# Altium PCB Master.PcbDoc (part 2 of 2)
Units mil, origin at the board's own origin, x right, y up, seen from the top; angles counter-clockwise.
Board outline 11420.03 x 8220.01 mil, 2 copper layers (Top Layer, Bottom Layer); 224 components, 0 nets, 1169 pads, 54 vias.
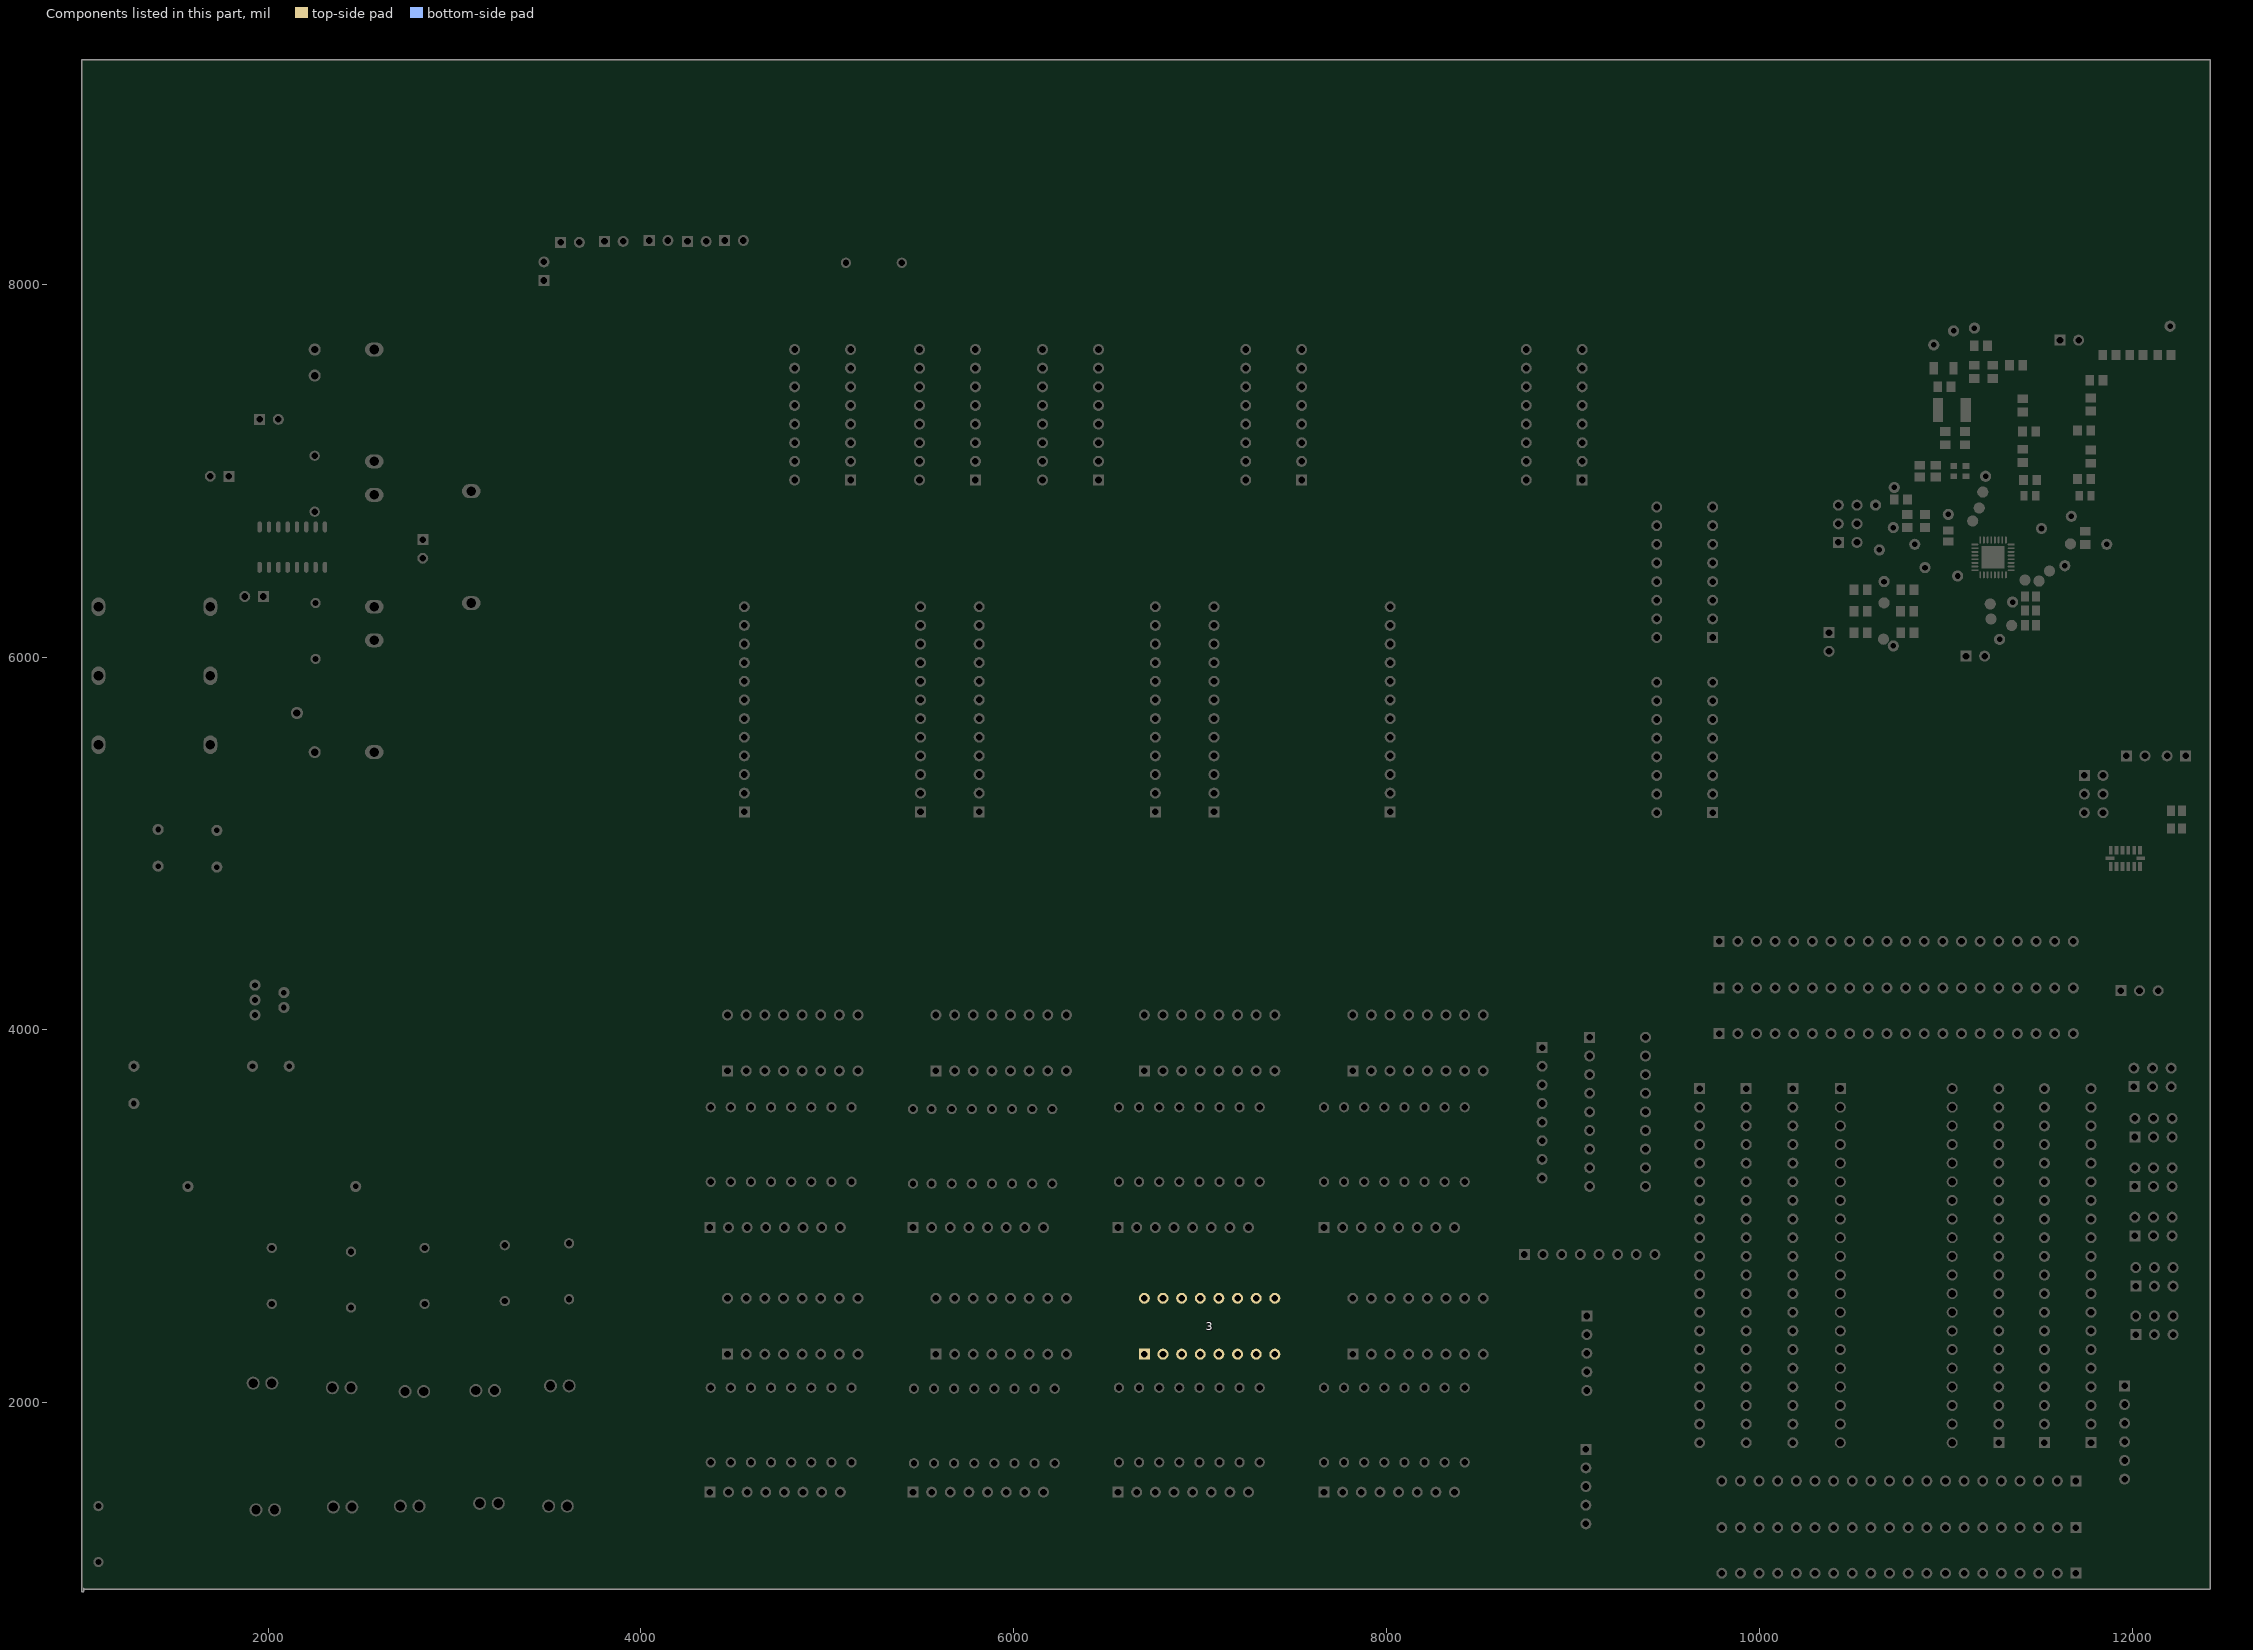
[diagram p2: the components of this part, seen from the top]

## Via types
v1: diameter 50, hole 28, Top Layer to Bottom Layer, 42 vias
v2: diameter 19.68, hole 7.87, Top Layer to Bottom Layer, 9 vias
v3: diameter 40, hole 27, Top Layer to Bottom Layer, 3 vias

## Nets (pads, with @x,y where several pads share a name; then routed paths per layer and width w, separated by ;. In a path a pad name is that pad's centre, name@x,y a point inside that pad or via, vN(x,y) a via of type N, cw(c..) or ccw(c..) an arc to the next point about the centre after c; other vN are vias at no path point) (continued)
copper on no net: | length 666454
  Top Layer w10: 1005,990 1005,9200 12415,9200 12415,1005 ; 1005,5340 2835,5340 2835,2980 ; 1005,5355 3235,5355 3235,7760 1005,7760 ; 1015,1005 12415,1005 ; 1090,5530 1090,5900 1090,6270 1090,6450 1240,6600 1635,6600 1690,6655 ; 1280,3605 1280,3610 ; 1280,3805 1280,3815 ; 1290,3600 1290,3605 ; 1690,5530 1690,5900 1690,6270 1715,6270 1810,6175 2000,6175 2105,6280 2105,6481.73 2105,6698.27 2105,7150 2145,7190 2145,7350 2110,7385 1865,7385 1790,7310 1790,6970 ; 1690,6970 1690,6655 ; 1875,6325 1955,6405 1955,6481.73 ; 1930,4155 1930,4160 ; 1950,7290 1950,6703.27 1955,6698.27 ; 1975,6325 2055,6405 2055,6481.73 ; 2005,6481.73 2005,6692.64 ; 2005,6600 1745,6600 1690,6655 ; 2050,7290 2055,7285 2055,6698.27 ; 2085,4115 2085,4120 ; 2155,5700 2155,6481.73 ; 2155,6698.27 2155,7090 2250,7185 2250,7510 ; 2205,6481.73 2205,6530 2235,6560 2800,6560 2830,6530 2830,6380 2920,6290 3090,6290 ; 2205,6698.27 2205,6640 2235,6610 2275,6610 2305,6640 2305,6698.27 2305,6805 2370,6870 2570,6870 2735,6870 2830,6775 2830,6630 3045,6630 3090,6675 3090,6890 ; 2250,5490 2570,5490 ; 2250,6703.27 2250,6780 2250,7080 2330,7080 2360,7050 2570,7050 ; 2250,7650 2570,7650 ; 2255,6481.73 2255,6290 2255,5990 2350,5990 2450,6090 2570,6090 ; 2305,6481.73 2305,6453.8 2305,6397.93 2305,6370 2405,6270 2570,6270 ; 2350,1440 2360,1440 ; 2425,2830 2445,2810 ; 2485,3580 2485,3585 ; 2710,1445 2725,1445 ; 2820,2810 2840,2830 2855,2845 ; 3480,8020 3678,8020 3855,8197 3855,8275 3907,8327 4048,8327 4100,8275 4100,7995 4790,7305 4839.53,7305 4869.53,7275 4869.53,7225.53 4838.53,7194.53 4800,7194.53 4780.47,7175 4780.47,6994.53 4825,6950 ; 3905,8230 3905,8133.11 4756.56,7281.56 4793.44,7281.56 4825,7250 4760.47,7185.47 4760.47,5775.47 4555,5570 ; 3955,995 9810,995 ; 3985,995 3985,4530 ; 3985,2990 3985,4530 ; 4145,8235 4239,8329 4350,8329 4398,8281 4398,7811 4804,7405 4850,7405 4870,7425 4870,7505 4825,7550 ; 4350,8230 4350,7825 4825,7350 ; 4370,1520 4370,1597 4374.88,1601.88 4374.88,1680 ; 4370,2940 4402.44,2972.44 4374.88,3000 4374.88,3185 ; 4374.88,2080 4374.88,2369.88 4565,2560 ; v1(4410,3980) 4565,3980 4665,4080 ; 4455,5170 4555,5170 ; 4465,2260 4465,2178.76 4482.76,2161 4482.76,2080 ; 4465,3780 4465,3690.76 4482.76,3673 4482.76,3585 ; 4470,1520 4470,1593 4482.76,1605.76 4482.76,1680 ; 4470,2940 4470,3056 4482.76,3068.76 4482.76,3185 ; 4495,5150 4555,5170 ; 4495,5190 4555,5170 ; 4550,8235 4550,7725 4825,7450 ; 4555,5160 4555,5180 ; 4555,5270 5031,5746 5031,7156 5125,7250 ; 4555,5470 4510,5425 4510,5245 4530,5225 5011,5225 5302,5516 5302,6663.27 5634,6995.27 5634,7189 5795,7350 ; 4555,5870 4510,5825 4510,5540 4530,5520 4620,5520 4803,5703 4803,6675 4997,6869 4997,7322 5125,7450 5170,7495 5520,7495 5540,7475 5540,7195 5495,7150 ; 4565,2260 4565,2105.63 4590.63,2080 ; 4565,3780 4565,3610.63 4590.63,3585 ; 4570,1520 4570,1659.37 4590.63,1680 ; 4570,2940 4570,3164.37 4590.63,3185 ; 4665,2260 4665,2113.5 4698.5,2080 ; 4665,3780 4665,3618.5 4698.5,3585 ; 4670,1520 4698.5,1548.5 4698.5,1680 ; 4670,2940 4698.5,2968.5 4698.5,3185 ; 4765,2260 4765,2121.38 4806.38,2080 ; 4765,3780 4765,3626.38 4806.38,3585 ; 4765,4080 4649,4196 4498,4196 4285,3983 4285,2754 4400,2639 4686,2639 4765,2560 4915,2410 5015,2410 5165,2260 5220,2315 ; 4770,1520 4806.38,1556.38 4806.38,1680 ; 4770,2940 4806.38,2976.38 4806.38,3185 ; 4825,7150 4957,7282 4957,7435 5027,7505 5143,7505 5233,7595 5587,7595 5771,7779 6251,7779 6287,7743 6287,7694 6243,7650 6155,7650 ; 4865,2260 4865,2129.25 4914.25,2080 ; 4865,2560 4675,2750 4420,2750 4315,2855 4315,3740 4470,3895 4680,3895 4865,4080 4952,3993 5152,3993 5285,3860 5285,2960 5495,2750 5793.1,2750 5983.1,2560 6180.1,2363 6354,2363 6462,2255 6462,2080 6515,2027 6592,2027 6620,2055 6620,2291 6650,2321 6847,2321 7056,2530 7056,2560 7101.19,2560 6928.19,2733 6538,2733 6505,2766 6505,3259 6619,3373 6619,3798 6751,3930 6951.19,3930 7101.19,4080 ; 4865,3780 4865,3634.25 4914.25,3585 ; 4870,1520 4914.25,1564.25 4914.25,1680 ; 4870,2940 4914.25,2984.25 4914.25,3185 ; 4965,2260 4965,2137.13 5022.13,2080 ; 4965,2560 v1(4965,2766) ; 4965,3780 4965,3642.13 5022.13,3585 ; 4965,4080 5049.53,4164.53 5998.57,4164.53 6083.1,4080 ; 4970,1520 5022.13,1572.13 5022.13,1680 ; 4970,2940 5022.13,2992.13 5022.13,3185 ; 5065,2260 5065,2145 5130,2080 ; 5065,3780 5065,3650 5130,3585 ; v1(5065,5345) 5282,5562 5282,6837 5495,7050 ; 5070,1520 5130,1580 5130,1680 ; 5070,2940 5130,3000 5130,3185 ; 5085,5160 5085,5180 ; v1(5085,6766) 5080,6771 5080,7105 5125,7150 ; v1(5125,5620) 5125,6950 ; 5125,7350 5395,7350 5495,7250 ; 5145,5150 5085,5170 ; 5145,5190 5085,5170 ; 5165,3780 5220,3725 5220,2315 ; 5165,4080 5497,4080 5551.53,4134.53 5728.57,4134.53 5783.1,4080 ; 5185,5170 5085,5170 ; v1(5235,6070) 5235,6914 5421,7100 5550,7100 5590,7140 5590,7345 5795,7550 ; 5300,5170 5400,5170 ; 5340,5150 5400,5170 ; 5340,5190 5400,5170 ; v1(5342,5870) 5342,5524 5065,5247 5065,5112 5132,5045 5132,4915 5174,4873 9663.47,4873 9705.47,4915 9705.47,5970.94 9794.53,6060 9794.53,6425.47 9770,6450 9730,6450 9705,6475 9705,6560 9750,6605 ; 5400,5160 5400,5180 ; v1(5455,5820) 5532,5820 5706,5994 5706,7155 5746,7195 5820,7195 5859.53,7234.53 5859.53,7405 5844.53,7420 5795,7450 ; 5460,1520 5460,1595 5464.88,1599.88 5464.88,1675 ; 5460,2940 5460,3175 ; 5460,3575 5460,3856.9 5683.1,4080 ; 5464.88,2075 5464.88,2341.79 5683.1,2560 ; 5495,7650 v1(5715,7870) ; 5500,5160 5500,5180 ; 5500,5270 5351,5270 5184,5103 5184,5005 5273,4916 9630,4916 9685.47,4971.47 9685.47,6340.47 9750,6405 ; 5500,5470 5395,5575 5395,6684 v1(5568,6857) ; 5500,5570 5572,5570 5677,5465 5677,5158 5714,5121 6320,5121 6436,5005 9489,5005 9604,5120 9604,6683.53 9670,6749.53 9770,6749.53 9794.53,6725 9794.53,6549.53 9750,6505 ; 5500,5770 5670,5770 5728,5828 5728,7084 5744,7100 5855,7100 5967,7212 v1(5967,7689) ; 5500,6070 5672,6242 5672,7193 5784,7305 5829.53,7305 5839.53,7315 5839.53,7394 5838.53,7395 5770,7395 5750,7415 5750,7474 5776,7500 5810,7500 5871.53,7561.53 5871.53,7675 5931.06,7734.53 v1(6236.47,7734.53) ; 5500,6170 5415,6085 5415,5586 5486,5515 5595,5515 5635,5475 5635,5166 5844,4957 9502,4957 9660,5115 9660,6615 9750,6705 ; 5559.88,3175 5559.88,3057.12 5560,3057 5560,2940 ; 5559.88,3575 5583.1,3598.21 5583.1,3780 ; 5560,1520 5560,1591 5572.76,1603.76 5572.76,1675 ; 5560,5150 5500,5170 ; 5560,5190 5500,5170 ; 5572.76,2075 5572.76,2162 5583.1,2172.34 5583.1,2260 ; 5600,5170 5500,5170 ; 5660,1520 5660,1654.37 5680.63,1675 ; 5660,2940 5660,3053 5667.76,3060.76 5667.76,3175 ; 5667.76,3575 5667.76,3669 5683.1,3684.34 5683.1,3780 ; 5680.63,2075 5680.63,2166 5683.1,2168.47 5683.1,2260 ; 5715,5170 5815,5170 ; 5755,5150 5815,5170 ; 5755,5190 5815,5170 ; 5760,1520 5788.5,1548.5 5788.5,1675 ; 5760,2940 5760,3049 5775.63,3064.63 5775.63,3175 ; 5775.63,3575 5775.63,3673 5783.1,3680.47 5783.1,3780 ; 5783.1,2260 5783.1,2169.41 5788.5,2164 5788.5,2075 ; 5795,6950 5750.47,6905.47 5750.47,5859.53 5790,5820 5830,5820 5900,5750 v1(5900,5470) ; 5795,7050 5870,6975 5870,6901 5770.47,6801.47 5770.47,5935 5780.47,5925 6057,5925 6357,5625 6782,5625 6804.53,5647.53 6804.53,5725.47 6760,5770 ; 5815,5160 5815,5180 ; 5815,5370 5876.74,5370 6021.74,5515 6785,5515 6824.53,5554.53 6824.53,6811.47 6758,6878 6758,6947 6455,7250 ; 5815,5470 5879.53,5534.53 5879.53,5675.47 5840,5715 5790,5715 5750,5675 5750,5255 5790,5215 6656,5215 6710,5161 6710,5134 6720,5124 6876,5124 6961,5209 6961,5275 7011,5325 7110,5325 7120,5335 7120,5415 7117,5418 7057.47,5418 7010.47,5465 7010.47,5772.47 7063,5825 7110,5825 7332,6047 7332,7181 7425,7274 7425,7305 7470,7350 7545,7350 ; 5815,5670 5770,5625 5770,5340 5790,5320 6638,5320 6735,5223 6830,5223 6872,5265 6872,7401 6778,7495 6600,7495 6455,7350 ; 5815,5970 6260,6415 6260,7255 6455,7450 ; 5815,6070 5859.53,6114.53 5859.53,6244.53 6230,6615 6230,7417 6318,7505 6539,7505 v1(6617,7583) ; 5815,6270 6200,6655 6200,7480 6270,7550 6455,7550 ; 5860,1520 5896.38,1556.38 5896.38,1675 ; 5860,2940 5883.5,2963.5 5883.5,3175 ; 5883.1,2260 5883.1,2173.28 5896.38,2160 5896.38,2075 ; 5883.1,3780 5883.1,3677.41 5883.5,3677 5883.5,3575 ; 5960,1520 6004.25,1564.25 6004.25,1675 ; 5960,2940 5991.38,2971.38 5991.38,3175 ; 5983.1,2260 5983.1,2096.16 6004.25,2075 ; 5983.1,3780 5983.1,3681.28 5991.38,3673 5991.38,3575 ; 6060,1520 6112.13,1572.13 6112.13,1675 ; 6060,2940 6099.25,2979.25 6099.25,3175 ; 6083.1,2260 6083.1,2104.03 6112.13,2075 ; 6083.1,2560 6338,2814.9 6338,3825.1 6083.1,4080 ; 6083.1,3780 6083.1,3685.16 6099.25,3669 6099.25,3575 ; 6155,7050 6110,7095 6110,7575 6130,7595 6568.84,7595 6607.84,7634 6726,7634 6990.47,7369.53 6990.47,5454.53 7075,5370 ; 6160,1520 6220,1580 6220,1675 ; 6160,2940 6207.13,2987.13 6207.13,3175 ; 6183.1,2260 6183.1,2111.9 6220,2075 ; 6183.1,3780 6183.1,3599.03 6207.13,3575 ; 6283.1,2260 6228.1,2315 6128.1,2315 5883.1,2560 5809.1,2634 5539,2634 5220,2315 ; 6283.1,2560 6338.1,2615 6846.19,2615 6901.19,2560 ; 6283.1,4080 6337.62,4134.53 6846.66,4134.53 6901.19,4080 ; v1(6328,7100) 6475,7100 6685,6890 6685,6145 6760,6070 ; v1(6339,5709) 6288,5760 6288,7241 6347,7300 6580,7300 v1(6735,7455) ; 6345,5160 6345,5180 ; 6405,5150 6345,5170 ; 6405,5190 6345,5170 ; 6445,5170 6345,5170 ; 6455,6950 6455,5975 6760,5670 ; 6455,7050 6528,6977 6528,6202 6760,5970 ; 6455,7150 6760,6845 6760,6270 ; 6560,1520 6560,1597 6564.88,1601.88 6564.88,1680 ; 6560,2940 6560,3060 6564.88,3064.88 6564.88,3185 ; 6560,5170 6660,5170 ; 6564.88,2080 6564.88,2323.69 6801.19,2560 ; 6564.88,3585 6539.66,3610.22 6539.66,3880 6570.6,3910.94 6632.13,3910.94 6801.19,4080 ; v1(6590,3855) 6633,3855 6772,3994 6915.19,3994 7001.19,4080 ; 6600,5150 6660,5170 ; 6600,5190 6660,5170 ; 6660,1520 6660,1593 6672.76,1605.76 6672.76,1680 ; 6660,2940 6660,3056 6672.76,3068.76 6672.76,3185 ; 6660,5160 6660,5180 ; 6672.76,2080 6701.19,2108.43 6701.19,2260 ; 6672.76,3585 6701.19,3613.43 6701.19,3780 ; 6760,1520 6760,1659.37 6780.63,1680 ; 6760,2940 6760,3164.37 6780.63,3185 ; 6760,5160 6760,5180 ; 6760,5270 6844.53,5354.53 6844.53,6912.47 v1(6832,6925) ; v1(6780,8115) 7245,7650 ; 6780.63,2080 6801.19,2100.56 6801.19,2260 ; 6780.63,3585 6801.19,3605.56 6801.19,3780 ; 6820,5150 6760,5170 ; 6820,5190 6760,5170 ; 6860,1520 6888.5,1548.5 6888.5,1680 ; 6860,2940 6888.5,2968.5 6888.5,3185 ; 6860,5170 6760,5170 ; 6888.5,2080 6888.5,2163 6901.19,2175.69 6901.19,2260 ; 6888.5,3585 6888.5,3676 6901.19,3688.69 6901.19,3780 ; 6960,1520 6996.38,1556.38 6996.38,1680 ; 6960,2940 6996.38,2976.38 6996.38,3185 ; 6975,5170 7075,5170 ; 6996.38,2080 6996.38,2167 7001.19,2171.81 7001.19,2260 ; 6996.38,3585 6996.38,3680 7001.19,3684.81 7001.19,3780 ; 7015,5150 7075,5170 ; 7015,5190 7075,5170 ; 7060,1520 7104.25,1564.25 7104.25,1680 ; 7060,2940 7104.25,2984.25 7104.25,3185 ; 7075,5160 7075,5180 ; 7075,5270 7120.54,5270 7135.54,5255 7434,5255 7590,5099 8172,5099 8675,5602 v1(8675,6135) ; 7075,5470 7030.47,5514.53 7030.47,5595 7050.47,5615 7130,5615 7448,5297 7803,5297 7975,5125 8129,5125 8489,5485 8489,6955 8534,7000 9000,7000 9050,6950 ; 7075,5570 7370,5275 7757,5275 v1(7867,5165) ; 7075,5770 7134.97,5770 7440,6075.03 7440,7153.59 7446.41,7160 7446.41,7286.41 7460,7300 7880,7300 8075,7105 8995,7105 9050,7050 ; v1(7084.19,2477) 7184.19,2477 7401.19,2260 ; 7101.19,2260 7101.19,2171.06 7104.25,2168 7104.25,2080 ; 7101.19,3780 7101.19,3683.06 7104.25,3680 7104.25,3585 ; 7160,1520 7212.13,1572.13 7212.13,1680 ; 7160,2940 7212.13,2992.13 7212.13,3185 ; 7201.19,2260 7201.19,2174.94 7212.13,2164 7212.13,2080 ; 7201.19,2560 7287.19,2646 7738,2646 ; 7201.19,3780 7201.19,3687.94 7212.13,3677 7212.13,3585 ; 7245,7150 7364.66,7269.66 7364.66,7644.66 7435,7715 8685,7715 8750,7650 ; 7260,1520 7320,1580 7320,1680 ; 7260,2940 7320,3000 7320,3185 ; 7301.19,2260 7301.19,2178.81 7320,2160 7320,2080 ; 7301.19,3780 7301.19,3691.81 7320,3673 7320,3585 ; 7401.19,2560 7456.19,2615 7964.29,2615 8019.29,2560 ; 7401.19,4080 7532.19,4211 7888.29,4211 8019.29,4080 ; v1(7480,5355) 7460,5375 7460,7140 7501,7181 7501,7206 7545,7250 ; v1(7500,7100) 7500,5690 8020,5170 ; 7545,6950 7545,5945 8020,5470 ; 7545,7050 7613,6982 7613,6177 8020,5770 ; 7545,7150 7884,6811 7884,6206 8020,6070 ; 7605,5160 7605,5180 ; 7664.88,1680 7664.88,1599.12 7665,1599 7665,1520 ; 7664.88,2080 7664.88,2305.6 7919.29,2560 ; 7664.88,3185 7664.88,3062.12 7665,3062 7665,2940 ; 7664.88,3585 7664.88,3825.6 7919.29,4080 ; 7665,5150 7605,5170 ; 7665,5190 7605,5170 ; 7705,5170 7605,5170 ; 7765,1520 7765,1596 7772.76,1603.76 7772.76,1680 ; 7765,2940 7765,3058 7772.76,3065.76 7772.76,3185 ; 7772.76,2080 7772.76,2213.47 7819.29,2260 ; 7772.76,3585 7819.29,3631.53 7819.29,3780 ; 7865,1520 7865,1592 7880.63,1607.63 7880.63,1680 ; 7865,2940 7865,3054 7880.63,3069.63 7880.63,3185 ; 7880.63,2080 7919.29,2118.66 7919.29,2260 ; 7880.63,3585 7919.29,3623.66 7919.29,3780 ; v1(7917,5336) 8006,5425 8055,5425 8065,5435 8065,7005 8110,7050 8750,7050 ; 7965,1520 7988.5,1543.5 7988.5,1680 ; 7965,2940 7988.5,2963.5 7988.5,3185 ; 7988.5,2080 8019.29,2110.78 8019.29,2260 ; 7988.5,3585 8019.29,3615.78 8019.29,3780 ; 8065,1520 8096.38,1551.38 8096.38,1680 ; 8065,2940 8096.38,2971.38 8096.38,3185 ; 8096.38,2080 8119.29,2102.91 8119.29,2260 ; 8096.38,3585 8119.29,3607.91 8119.29,3780 ; 8119.29,2560 8204.29,2475 8304.29,2475 8519.29,2260 ; 8165,1520 8204.25,1559.25 8204.25,1680 ; 8165,2940 8204.25,2979.25 8204.25,3185 ; 8204.25,2080 8204.25,2162 8219.29,2177.03 8219.29,2260 ; 8204.25,3585 8204.25,3674 8219.29,3689.03 8219.29,3780 ; 8219.29,2560 8273.86,2505.42 8316.29,2505.42 8496.48,2325.24 8574,2325.24 8574,1421 8700,1295 9100,1295 9125,1320 9125,1395 9070,1450 9154.53,1534.53 9154.53,2285.47 9075,2365 8685,2755 8685,4197 8652,4230 8369.29,4230 8219.29,4080 ; 8265,1520 8312.13,1567.13 8312.13,1680 ; 8265,2940 8312.13,2987.13 8312.13,3185 ; 8312.13,2080 8312.13,2166 8319.29,2173.16 8319.29,2260 ; 8312.13,3585 8312.13,3678 8319.29,3685.16 8319.29,3780 ; 8319.29,4080 8374.29,4135 8548,4135 8604,4079 8604,2520 8589.31,2505.31 8373.97,2505.31 ; 8365,1520 8420,1575 8420,1680 ; 8365,2940 8420,2995 8420,3185 ; 8419.29,2260 8419.29,2169.71 8420,2169 8420,2080 ; 8419.29,2560 8574,2714.71 8574,3925.29 8419.29,4080 ; 8419.29,3780 8419.29,3682.71 8420,3682 8420,3585 ; 8740,2795 8740,3030.47 8889.53,3180 8889.53,3659.53 9090,3860 ; v1(8750,6105) 8750,6950 ; 8750,7150 8685,7215 8685,7575 8705,7595 8775,7595 8795,7615 8795,7825 v1(8750,7870) ; 8750,7250 8795,7295 9075,7295 9115,7255 9115,6939 ; 8750,7550 8895,7405 9062,7405 9553,6914 9553,6808 9450,6705 9476.28,6678.72 9490.8,6678.72 9514.53,6655 9514.53,5829.53 9450,5765 ; v1(8776,5865) 8776,5657 9313,5120 9470,5120 9517,5167 v1(9517,5265) ; 8835,3205 8780,3260 8780,3955 8850,4025 9150,4025 9218,3957 9218,3832 9390,3660 ; 8840,2795 8840,3055.48 8919.53,3135.01 8919.53,3489.53 9090,3660 ; 8940,2795 8940,3103.47 8949.53,3113 8949.53,3319.53 9090,3460 ; v1(8990,6105) 8990,5625 9450,5165 ; 9040,2795 9040,3138 9031,3147 9031,3201 9090,3260 ; 9050,7250 9095,7205 9095,5578 v1(9333,5340) ; 9050,7350 9159,7241 v1(9159,6955) ; 9050,7650 9750,6950 9750,6805 9814.53,6740.47 9814.53,5929.53 9750,5865 ; 9070,1350 8986,1434 8986,2176 9075,2265 8974,2366 8513.29,2366 8373.97,2505.31 ; 9070,1650 9124.53,1704.53 9124.53,2015.47 9075,2065 ; 9070,1750 9016,1804 9016,2106 9075,2165 ; 9340,2795 9340,2908 9335,2913 9335,3505 9390,3560 ; 9390,3760 9445,3705 9445,3138 9440,3133 9440,2795 ; 9450,5365 9365.47,5449.53 9365.47,6735.47 9407.97,6777.97 9422.97,6777.97 9450,6805 ; 9450,5465 9495,5420 9495,5345 9470,5320 9430,5320 9115,5635 9115,6939 ; 9450,5565 9495,5610 9495,5695.47 9470,5720.47 9430,5720.47 9405.47,5745 9405.47,5785 9440.47,5820 9470,5820 9494.53,5844.53 9494.53,6335.47 9470,6360 9430,6360 9405.47,6384.53 9405.47,6460.47 9450,6505 ; 9450,5665 9385.47,5729.53 9385.47,6540.47 9450,6605 ; 9450,6405 9494.53,6449.53 9494.53,6632.47 9467,6660 9430,6660 9405,6685 9405,6735 9425,6755 9464.53,6755 9495,6785.47 9495,6825 9470,6850 9204,6850 9115,6939 ; 9545,995 9560,995 ; 9545,4530 9560,4530 ; v1(9555,6061) 9558,6058 v1(9558,5365) ; 9560,1000 9560,4530 ; 10220,5920 12250.12,5920 12250.12,6950 12250.12,7850 10155,7850 10155,5920 10230,5920 ; 10374.25,6130.87 10508.82,6130.87 10508.82,6245.87 10508.82,6360.87 ; 10579.68,6130.87 10669.25,6130.87 ; 10579.68,6245.87 10669.68,6245.87 ; 10579.68,6360.87 10669.25,6360.87 ; 10624.25,6815 10624.25,7028.94 10799.25,7028.94 ; 10644.25,6575 10644.25,6545.16 10849.25,6545.16 ; 10666.75,6095.87 10702.62,6060 10719.25,6060 10729.25,6060 ; 10669.25,6095.87 10669.25,6130.87 ; v1(10669.25,6205.87) 10669.68,6205.87 10669.68,6245.87 ; 10669.68,6290.87 10669.68,6245.87 ; 10669.68,6405.87 10669.25,6405.87 10669.25,6405 10669.25,6360.87 ; 10709.25,6694.57 10719.25,6694.57 10794.25,6694.57 10794.25,6635 10594.25,6635 10594.25,6525.16 11156.81,6525.16 ; 10723.82,6845 10724.25,6845 10724.25,6910 ; 10751.75,6110.87 10751.75,6130.87 ; 10751.75,6155.87 10751.75,6130.87 ; 10758.39,6245.87 10669.68,6245.87 ; 10758.82,6130.87 10751.75,6130.87 ; 10758.82,6360.87 10669.25,6360.87 ; 10794.69,6845 10794.25,6845 10794.25,6765.43 10889.25,6765.43 11014.25,6765.43 11014.25,6685 ; 10824.25,6544.84 11156.81,6544.84 ; 10829.25,6360.87 10829.68,6360.87 10829.68,6130.87 ; 10834.25,6605 10869.25,6605 10869.25,6564.53 10899.25,6564.53 ; 10860.95,6965.94 10860.95,6924.88 11154.25,6924.88 11154.25,7025 ; 10889.25,6480 11004.25,6480 11004.25,6505.47 11156.81,6505.47 ; 10899.25,6690 10899.25,6564.53 ; 10935.24,7545 10935.24,7450 10957.95,7450 10957.95,7325 10958.58,7325 ; 10936.1,7550 10936.1,7675 10936.1,7690 ; 10947.56,6965.94 10945.69,6967.31 10860.95,7028.94 10799.25,7028.94 ; 10947.56,6969.88 11044.25,6969.88 11109.25,6969.88 ; 10947.56,7028.94 10947.56,7025 11044.25,7025 11044.25,7070 11283.46,7070 ; 10998.39,7210.43 11103.39,7210.43 ; 11014.25,6620.47 11014.25,6584.21 11156.81,6584.21 v2@11205.04,6584.21 ; 11014.25,6679.53 11014.25,6685 ; 11028.82,7450 11043.39,7450 11043.39,7545 11041.54,7545 ; 11042.4,7550 11042.4,7750 10799.25,7750 10799.25,7139.57 ; 11064.25,6425 11064.25,6435 11064.25,6485.79 11156.81,6485.79 ; 11103.39,7139.57 10998.39,7139.57 10799.25,7139.57 ; 11108.19,7325 11108.19,7210.43 11103.39,7210.43 ; 11109.25,6005 11109.25,6466.1 11156.81,6466.1 ; 11109.25,7025 11154.25,7025 ; 11139.25,6740 11139.25,6708.9 11185.35,6708.9 11185.35,6628.5 ; 11153.39,7494.57 11253.39,7494.57 ; 11153.39,7565.43 11152.95,7565.43 11152.95,7670 11154.25,7670 11154.25,7765 11154.25,7780 ; 11156.81,6564.53 10899.25,6564.53 ; 11156.81,6603.9 11085.35,6603.9 11085.35,6685 11014.25,6685 ; 11199.25,6885 11224.72,6885 11224.72,6628.5 ; v2@11205.04,6535 11205.04,6441.5 11205.04,6380 11184.25,6380 11184.25,6095 11289.25,6095 11483.78,6095 11483.78,6170 11483.78,6250 11483.78,6325 ; 11205.04,6628.5 11205.04,6795 ; 11223.82,7670 11223.82,7780 12208.82,7780 12208.82,7620 12208.39,7620 ; 11224.72,6441.5 11224.72,6535 ; 11229.25,6970 11244.41,6970 11244.41,6628.5 ; 11243.39,6205 11282.91,6205 ; 11244.41,6441.5 11244.41,6535 v2(11254.25,6535) ; 11253.39,7565 11342.95,7565 ; 11263.78,7025 11154.25,7025 ; 11264.09,6280 11264.09,6441.5 ; 11264.09,6628.5 11264.09,7025 ; 11283.78,6205 11283.78,6441.5 ; 11283.78,6628.5 11283.78,7070 ; 11303.15,7105 11174.25,7105 11174.25,7210 11103.39,7210 11103.39,7210.43 ; 11303.46,6441.5 11303.46,6170 11424.72,6170 ; 11303.46,6628.5 11303.46,7105 ; 11323.15,6441.5 11323.15,6295 ; 11323.15,6628.5 11323.15,6765 11483.39,6765 11483.39,6865 ; 11351.69,6466.1 11351.69,6465 11424.25,6465 11424.25,6325 ; 11351.69,6485.79 11489.25,6485.79 11489.25,6407.44 11500.98,6407.44 ; 11351.69,6505.47 11561.81,6505.47 11561.81,6466.73 ; 11351.69,6525.16 11624.25,6525.16 11624.25,6525 11639.25,6525 11639.25,6490 11639.25,6480 ; 11351.69,6544.84 12058.82,6544.84 12058.82,7620 12137.95,7620 12143.39,7620 ; 11351.69,6564.53 11749.25,6564.53 ; 11351.69,6584.21 11604.25,6584.21 ; 11351.69,6603.9 11404.25,6603.9 11404.25,6690 11514.25,6690 11559.25,6690 11559.25,6950 ; 11369.25,6295 11359.25,6295 11323.15,6295 ; 11413.39,6865 11413.39,6950 ; 11413.39,7044.57 11413.39,6950 ; 11413.39,7115.43 11413.39,7210 11412.95,7210 11412.95,7314.57 11413.39,7314.57 ; 11413.39,7385.43 11413.39,7560 ; 11413.82,7560 11413.39,7560 ; 11417.95,6950 11413.39,6950 ; 11424.72,6250 11323.15,6250 11323.15,6295 ; 11483.82,7210 11559.25,7210 ; 11488.82,6950 11559.25,6950 ; 11570,4640 11570,5670 11590,5670 ; 11580.12,5670 12415,5670 ; 11604.25,6584.53 11604.25,6865 11716.89,6865 ; 11613.39,7700 11413.39,7700 11413.39,7560 ; 11669.25,6607.44 11749.25,6607.44 11749.25,6604.57 11749.25,6564.53 ; 11674.25,6755 11749.25,6755 11749.25,6675.43 ; v1(11704.25,5015) 11885.51,5015 11885.51,4963.31 ; 11707.95,6955 11707.95,6950 11559.25,6950 ; 11707.95,7215 11707.95,7210 11559.25,7210 ; 11713.39,7700 11778.39,7700 11778.39,7390.43 ; 11744.25,5265 11644.25,5265 11644.25,4920 11881.57,4920 ; 11772.95,7485 11774.25,7485 ; 11778.39,7039.57 11778.82,7039.57 11778.82,6955 11778.82,6865 11779.88,6865 ; 11778.39,7110.43 11778.82,7110.43 11778.82,7215 11778.39,7215 11778.39,7319.57 ; 11842.95,7620 11843.82,7620 11843.82,7480 ; 11844.25,5265 11919.25,5265 11919.25,4963.31 11917.01,4963.31 ; 11864.25,6605 11864.25,6564.53 11749.25,6564.53 ; 11884.25,4876.69 11885.51,4876.69 11885.51,4755 12264.25,4755 12264.25,5080 12268.78,5080 ; 11913.82,7620 11987.95,7620 ; 11914.25,4876.69 11917.01,4876.69 ; 11920.2,4876.69 11920.2,4920 11980,4920 ; 11940,4210 11940,3765 12010,3695 12045.47,3659.53 12045.47,3639.53 12060,3625 12060,3470 12015,3425 11970.47,3380.47 11970.47,3204.53 12015,3160 11970.47,3115.47 11970.47,2939.53 12015,2895 11975,2855 11975,2670 12020,2625 11975.47,2580.47 11975.47,2409.53 12020,2365 ; 11948.5,4755 11948.5,4876.69 ; 11948.5,4963.31 11979.25,4963.31 ; 11960,1790 12005,1835 12005,2001 12004,2002 12004,2011.47 11970,2045.47 11915.47,2045.47 11915.47,2134.53 12021.94,2241 12150,2241 12230,2321 12250,2321 12264.53,2335.53 12264.53,2750 12215,2799.53 12215,2895 ; 11960,1990 11924.53,2025.47 11895.47,2025.47 11895.47,2170.47 12022.04,2297.04 12166.04,2297.04 12170,2301 12170,3304.53 12191,3325.53 12191,3401 12215,3425 ; 11960,2090 12035,2090 12190.28,2245.28 12227.42,2245.28 12284.53,2302.39 12284.53,2791.5 12265,2811.03 12265,3640 12210,3695 ; v1@11962.56,5170 11979.25,5153.31 11979.25,4963.31 ; 11969.25,5465 11969.25,5405 11969.25,5385 12011.5,5385 12011.5,5285 12011.5,4963.31 ; v1(11999.25,4805) 11980,4805 11980,4876.69 ; 12011.5,4876.69 11980,4876.69 ; 12040,4210 12040,4001 12088,3953 12088,3817 12110,3795 12065.47,3750.47 12065.47,3650 12115,3600.47 12115,3525 ; 12042.99,4755 12042.99,4876.69 ; 12042.99,4963.31 12042.99,5385 12074.25,5385 12074.25,5465 ; 12046.93,4920 v1(12144.25,4920) ; 12120,2365 12090,2365 12075.47,2379.53 12075.47,2490.47 12120,2535 12120,2625 12075,2670 12075,2855 12115,2895 12115,2925.47 12070.47,2970 12070.47,3039.53 12115,3084.06 12115,3160 12070.47,3204.53 12070.47,3380.47 12115,3425 12160,3470 12160,3645 12110,3695 12155,3740 12155,3982 12140,3997 12140,4210 ; v1@12124.25,4805 v1(12144.25,4805) 12209.25,4805 12209.25,5080 ; 12187.99,5470 12187.99,5400 12209.25,5400 12209.25,5175 ; 12209.72,5080 12209.72,5175 ; 12274.25,5080 12274.25,5400 12287.99,5400 12287.99,5470 ; 3985,4530 9560,4530 ; 3985,4530 9560,4530 ; 6083.1,4080 6167.62,4164.53 7116.66,4164.53 7201.19,4080 7607,3674.19 7607,2777 7738,2646 ; 7738,2646 8233.29,2646 8319.29,2560 8373.97,2505.31 ; 9560,4530 9560,4640 12415,4640 12415,1005 ; 10669.25,6130.87 10751.75,6130.87 ; 10799.25,7028.94 10799.25,7139.57 ; 11559.25,6950 11559.25,7210 ; 11979.25,4963.31 11980,4963.31 11980,4920 ; 11980,4876.69 11980,4920 ; 1005,995 3940,995 3940,2980 1005,2980 1005,995 ; 3380,4715 9975,4715 9975,8640 3380,8640 3380,4715
  Top Layer w20: 1090,1445 1090,1740 1305,1740 ; 1100,1155 1380,1155 1380,1610 v3(1380,1690) ; 1290,1740 v3(1380,1740) ; v3(1380,1790) 1525,1790 ; 1525,1795 1665,1655 1665,1415 1920,1415 1975,1360 2270,1360 2350,1440 ; 1920,2105 1920,1530 2025,1425 ; 2020,2105 2020,2530 ; 2020,2830 2425,2830 ; 2345,2080 2345,1545 2450,1440 ; 2360,1440 2360,1310 2575,1310 2710,1445 ; 2445,2080 2445,2510 ; 2445,2810 2675,2810 ; 2675,2915 2675,2810 ; 2725,1445 2725,1395 2780,1340 2914.47,1340 2924.47,1330 2934.82,1330 2999.82,1395 3070,1395 3135,1460 3135,1395 3190,1340 3400,1340 3505,1445 ; 2735,2060 2735,1520 2810,1445 ; 2820,2810 2675,2810 ; 2835,2060 2835,2525 ; 2855,2845 3270,2845 3605,2845 ; 3115,2065 3115,1580 3235,1460 ; 3215,2065 3215,2490 3270,2545 ; 3515,2090 3515,1535 3605,1445 ; 3615,2090 3615,2555
  Top Layer w30: 1155,4320 1155,4640 1560,4640 1560,4875 ; 1160,4290 1280,4290 1280,3805 ; 1160,4340 1405,4340 1405,4155 1930,4155 ; 1245,5235 1480,5235 1480,5075 ; 1290,3600 1290,3155 1555,3155 ; 1290,3605 1505,3605 1505,3815 1505,3995 2180,3995 2180,4200 2085,4200 ; 1410,4878.15 1700,4878.15 ; 1410,5075 1700,5075 ; 1725,5070 1845,5070 1845,4240 1930,4240 ; 2085,4120 2010,4120 2010,4305 2605,4305 2605,3585 2485,3585 ; 2470,3160 2470,3410 2113.43,3410 2113.43,3810 2485,3810 2485,3580
  Bottom Layer w10: 2015,2825 2030,2810 ; 2820,2810 2840,2830 2855,2845 ; 3480,8120 4290,8120 4295,8115 5100,8115 ; 3570,8225 3670,8225 3737,8158 5120,8158 5143,8135 5143,7668 ; 3605,2845 3615,2855 ; 3805,8230 3905,8230 ; 4045,8235 4145,8235 ; 4250,8230 4350,8230 ; 4374.88,3585 4360,3585 4360,4105 4400,4145 4500,4145 4565,4080 ; v1(4410,3980) 4410,3713 5901,3713 5938,3676 5938,3126 6000,3064 7246,3064 7469,2841 8238.29,2841 8519.29,2560 ; 4450,8235 4550,8235 ; 4465,2560 4520,2615 5010,2615 5065,2560 5120,2505 5528.1,2505 5583.1,2560 5638.1,2505 6128.1,2505 6183.1,2560 6242.1,2501 6642.19,2501 6701.19,2560 6756.19,2615 7246.19,2615 7301.19,2560 7356.19,2505 7764.29,2505 7819.29,2560 7874.29,2615 8364.29,2615 8419.29,2560 8474.29,2505 8574,2505 8609,2540 9100,2540 9160,2480 9160,1359 9096,1295 9015,1295 9015,1750 9070,1750 ; 4465,4080 4520,4025 5010,4025 5065,4080 5124,4021 5524.1,4021 5583.1,4080 5638.1,4135 6128.1,4135 6183.1,4080 6238.1,4025 6646.19,4025 6701.19,4080 6921.19,4300 7081.19,4300 7301.19,4080 7356.19,4025 7764.29,4025 7819.29,4080 8042.29,4303 8196.29,4303 8419.29,4080 8617.29,4278 9072,4278 9390,3960 ; 4555,5170 4510,5215 4510,6095 4530,6115 4580,6115 4600,6135 4600,6195 4575,6220 4533,6220 4510.47,6242.53 4510.47,6937.47 4773,7200 5328,7200 5428,7300 5510,7300 5525,7285 5760,7285 5795,7250 ; 4555,5370 5027,5370 5042.83,5385.83 5097,5385.83 5112.83,5370 5500,5370 5815,5370 ; 4555,5670 5500,5670 5815,5670 ; 4555,5770 5405,5770 v1(5455,5820) ; 4555,5870 4605,5920 5830,5920 5860,5950 5860,5995 5840,6015 5790,6015 5770,6035 5770,6195 5790,6215 6323,6215 6715,5823 8816,5823 8858,5865 9450,5865 ; 4555,5970 5500,5970 5815,5970 ; 4555,6070 v1(5235,6070) ; 4555,6170 4528.72,6196.28 4490.47,6215 4490.47,7326.47 4759,7595 5028.21,7595 5073.21,7550 5125,7550 ; 4555,6270 5500,6270 5815,6270 ; 4665,2560 4851,2374 8984,2374 9075,2465 9130,2410 9130,1610 9070,1550 ; 4825,6950 4870,6905 5450,6905 5495,6950 5540,6905 6110,6905 6155,6950 6222.98,6882.02 7177.02,6882.02 7245,6950 7290,6905 8705,6905 8750,6950 ; 4825,7050 4875,7100 5566,7100 5671,6995 6762,6995 v1(6832,6925) ; 4825,7250 4780,7295 4780,7375 4800,7395 4959,7395 5004,7350 5125,7350 ; 4825,7350 4870,7305 5265,7305 5310,7350 5495,7350 5540,7305 6110,7305 6155,7350 6200,7305 7200,7305 7245,7350 7290,7305 8705,7305 8750,7350 8895,7205 9291,7205 9383,7113 9383,6572 9450,6505 ; 4825,7450 4953,7450 4998,7405 5450,7405 5495,7450 5540,7405 6110,7405 6155,7450 6200,7405 7200,7405 7245,7450 7290,7405 8705,7405 8750,7450 8900,7300 9390,7300 9495,7195 9495,6650 9450,6605 ; 4825,7550 4870,7505 5450,7505 5495,7550 5540,7505 6110,7505 6155,7550 6200,7505 6828,7505 6873,7550 7245,7550 7372,7550 7417,7505 8705,7505 8750,7550 ; 4825,7650 5013.47,7650 5058,7605.47 6559.47,7605.47 6577,7623 7151,7623 7222.53,7694.53 7280.47,7694.53 7351,7624 7479,7624 7503,7600 8795,7600 8991,7404 9750,7404 9795,7359 9795,6275 9775,6255 9500,6255 9450,6305 ; v1(4965,2766) 5877.1,2766 6083.1,2560 ; v1(5065,5345) 5190,5220 6710,5220 6760,5170 ; v1(5085,6766) 6127.11,6766 6723.11,6170 6760,6170 ; v1(5125,5620) 6710,5620 6760,5570 ; 5125,7050 5075,7000 4805,7000 4780,6975 4780,6775 4830,6725 5905,6725 6760,5870 ; 5165,2560 5220,2615 5728.1,2615 5783.1,2560 ; 5165,3780 5315,3930 5733.1,3930 5883.1,4080 6099.1,3864 6199.1,3864 6283.1,3780 6362.1,3859 7322.19,3859 7322.19,3855 ; v1(5342,5870) 5500,5870 ; 5400,8115 v1(6780,8115) ; 5495,7150 5622,7150 5667,7105 6110,7105 6155,7150 ; 5495,7250 5540,7205 5953,7205 5998,7250 6155,7250 6282,7250 6327,7205 7200,7205 7245,7250 7290,7205 8705,7205 8750,7250 ; 5500,5170 5564.53,5105.47 7746.01,5105.47 7957,5316.46 9309.46,5316.46 v1(9333,5340) ; v1(5568,6857) 9061,6857 v1(9159,6955) ; v1(5715,7870) v1(8750,7870) ; 5795,7150 5927,7150 5975,7198 6230,7198 v1(6328,7100) ; 5815,5170 5859.53,5125.47 7250.47,5125.47 v1(7480,5355) ; 5815,5270 5960,5415 7400,5415 7420,5435 7560,5435 7580,5415 9700,5415 9750,5465 ; 5815,5570 5865,5520 9705,5520 9750,5565 ; 5815,5770 5876,5709 v1(6339,5709) ; 5815,5870 6491,5870 6736,5625 8102,5625 8192,5715 9700,5715 9750,5665 ; 5815,6170 6270,6170 6715,5725 8106,5725 8162,5781 9376,5781 9405,5810 9528,5810 9573,5765 9750,5765 ; v1(5900,5470) 6760,5470 ; v1(5967,7689) 6075,7797 9053,7797 9114.53,7735.47 9114.53,7514.53 9050,7450 ; 5983.1,4080 6133.1,3930 6951.19,3930 7101.19,4080 ; v1(6236.47,7734.53) 9034.47,7734.53 9094.53,7674.47 9094.53,7594.53 9050,7550 ; 6283.1,2260 6547.1,1996 7350,1996 7401.19,2047.19 7401.19,2260 7456.19,2315 8464.29,2315 8519.29,2260 8714.29,2065 9075,2065 ; v1(6590,3855) 7322.19,3855 ; v1(6617,7583) 6629,7595 7428,7595 7473,7550 7545,7550 ; v1(6735,7455) 6828,7455 6871,7498 7372,7498 7420,7450 7545,7450 ; 6760,5370 7075,5370 7385,5370 7430,5415 7531.46,5415 7570,5376.46 7939,5376.46 7945.46,5370 8020,5370 ; 6760,5670 7075,5670 8020,5670 ; 6760,5970 7075,5970 8020,5970 ; 6760,6270 7075,6270 8020,6270 ; 7001.19,2560 v1(7084.19,2477) ; 7075,5170 7235,5170 7460,5395 7520,5395 7579,5336 v1(7917,5336) ; 7075,5870 7125,5920 9503.21,5920 9595,6011.79 9595,6086.89 9713.11,6205 9750,6205 ; 7075,6070 6921,6224 6726,6224 6715,6235 6715,6295 6743,6323 8605,6323 9199,6917 9199,7001 9050,7150 ; 7075,6170 7125,6220 9225,6220 9360,6355 9700,6355 9750,6305 ; 7101.19,2560 7251.19,2410 8069.29,2410 8219.29,2560 ; 7245,7050 7450,7050 v1(7500,7100) ; v1(7867,5165) 7957,5075 8499,5075 8634,5210 9770,5210 9814.53,5254.53 9814.53,6040.47 9750,6105 ; 8020,5270 8735,5270 8740,5265 9450,5265 ; 8020,5570 8735,5570 8785,5620 9770,5620 9794.53,5644.53 9794.53,5785 9770,5809.53 9730,5809.53 9705,5834.53 9705,6150 9790,6150 9839,6101 9839,5203 9801,5165 9750,5165 ; 8020,5870 8771,5870 v1(8776,5865) ; 8020,6170 8133,6057 9551,6057 v1(9555,6061) ; v1(8675,6135) 8710,6170 9415,6170 9450,6205 ; v1(8750,6105) v1(8990,6105) 9450,6105 ; 8835,3305 8685,3155 8685,2751 8725,2711 9451,2711 9495,2755 9495,3355 9390,3460 ; 8835,3405 8963,3277 8963,3204 9100,3067 9197,3067 9390,3260 ; 8835,3505 9016,3324 9016,3234 9090,3160 ; 8835,3605 9060,3380 9090,3380 9090,3360 ; 8835,3705 8945,3705 9090,3560 ; 8835,3805 8880,3760 9090,3760 ; 8835,3905 8890,3960 9090,3960 ; 9050,7650 9005,7695 7590,7695 7545,7650 7480.47,7714.53 6519.53,7714.53 6455,7650 6250.31,7650 6205.31,7695 6054.15,7695 6007.6,7648.45 5929.15,7648.45 5927.6,7650 5795,7650 5750,7695 5170,7695 5143,7668 ; 9140,2795 9390,3045 9390,3160 ; 9240,2795 9445,3000 9445,3305 9390,3360 ; 9390,3860 9232.21,4017.79 8757.07,4017.79 8519.29,3780 8369.29,3930 8269.29,3930 8119.29,4080 7969.29,3930 7551.19,3930 7401.19,3780 ; v1(9517,5265) 9750,5265 ; v1(9558,5365) 9750,5365 ; 9680,1785 9930,1785 10180,1785 10435,1785 ; 9680,1885 9930,1885 10180,1885 10435,1885 ; 9680,1985 9930,1985 10180,1985 10435,1985 ; 9680,2085 9930,2085 10180,2085 10435,2085 ; 9680,2185 9930,2185 10180,2185 10435,2185 ; 9680,2285 9930,2285 10180,2285 10435,2285 ; 9680,2385 9930,2385 10180,2385 10435,2385 ; 9680,2485 9930,2485 10180,2485 10435,2485 ; 9680,2585 9930,2585 10180,2585 10435,2585 ; 9680,2685 9930,2685 10180,2685 10435,2685 ; 9680,2785 9930,2785 10180,2785 10435,2785 ; 9680,2885 9930,2885 10180,2885 10435,2885 ; 9680,2985 9930,2985 10180,2985 10435,2985 ; 9680,3085 9930,3085 10180,3085 10435,3085 ; 9680,3185 9930,3185 10180,3185 10435,3185 ; 9680,3285 9930,3285 10180,3285 10435,3285 ; 9680,3385 9930,3385 10180,3385 10435,3385 ; 9680,3485 9930,3485 10180,3485 10435,3485 ; 9680,3585 9930,3585 10180,3585 10435,3585 ; 9680,3685 9930,3685 10180,3685 10435,3685 ; 9785,3980 9785,4225 9785,4475 ; 9799,1085 9799,1330 9799,1580 ; 9885,3980 9885,4225 9885,4475 ; 9899,1085 9899,1330 9899,1580 ; 9985,3980 9985,4225 9985,4475 ; 9999,1085 9999,1330 9999,1580 ; 10085,3980 10085,4225 10085,4475 ; 10099,1085 10099,1330 10099,1580 ; 10185,3980 10185,4225 10185,4475 ; 10199,1085 10199,1330 10199,1580 ; 10285,3980 10285,4225 10285,4475 ; 10299,1085 10299,1330 10299,1580 ; 10374.25,6030.87 10420.12,5985 11054.25,5985 11054.25,6095 11289.25,6095 11514.25,6095 11514.25,6690 ; 10385,3980 10385,4225 10385,4475 ; 10399,1085 10399,1330 10399,1580 ; 10424.25,6615 10424.25,6505 10814.25,6505 10814.25,6480 10889.25,6480 ; 10424.25,6715 10424.25,6765 10709.25,6765 10709.25,6694.57 10719.25,6694.57 ; 10485,3980 10485,4225 10485,4475 ; 10499,1085 10499,1330 10499,1580 ; 10524.25,6715 10644.25,6715 10644.25,6575 ; 10524.25,6815 10624.25,6815 ; 10585,3980 10585,4225 10585,4475 ; 10599,1085 10599,1330 10599,1580 ; v1(10669.25,6205.87) 11359.25,6205.87 11359.25,6295 ; 10669.25,6405 11009.25,6405 11009.25,6765.43 11014.25,6765.43 ; 10685,3980 10685,4225 10685,4475 ; 10699,1085 10699,1330 10699,1580 ; 10719.25,6060 10464.25,6060 10444.25,6080 10444.25,6420 10254.25,6420 10254.25,7675 10936.1,7675 ; 10724.25,6910 10424.25,6910 10424.25,6815 10344.25,6815 10344.25,6460 10489.25,6460 10489.25,6330 11064.25,6330 11064.25,6435 ; 10785,3980 10785,4225 10785,4475 ; 10799,1085 10799,1330 10799,1580 ; 10834.25,6605 10834.25,6875 11214.25,6875 11214.25,6970 ; 10885,3980 10885,4225 10885,4475 ; 10899,1085 10899,1330 10899,1580 ; 10985,3980 10985,4225 10985,4475 ; 10999,1085 10999,1330 10999,1580 ; 11035,1785 11285,1785 11530,1785 11780,1785 ; 11035,1885 11285,1885 11530,1885 11780,1885 ; 11035,1985 11285,1985 11530,1985 11780,1985 ; 11035,2085 11285,2085 11530,2085 11780,2085 ; 11035,2185 11285,2185 11530,2185 11780,2185 ; 11035,2285 11285,2285 11530,2285 11780,2285 ; 11035,2385 11285,2385 11530,2385 11780,2385 ; 11035,2485 11285,2485 11530,2485 11780,2485 ; 11035,2585 11285,2585 11530,2585 11780,2585 ; 11035,2685 11285,2685 11530,2685 11780,2685 ; 11035,2785 11285,2785 11530,2785 11780,2785 ; 11035,2885 11285,2885 11530,2885 11780,2885 ; 11035,2985 11285,2985 11530,2985 11780,2985 ; 11035,3085 11285,3085 11530,3085 11780,3085 ; 11035,3185 11285,3185 11530,3185 11780,3185 ; 11035,3285 11285,3285 11530,3285 11780,3285 ; 11035,3385 11285,3385 11530,3385 11780,3385 ; 11035,3485 11279,3485 ; 11035,3585 11285,3585 11530,3585 11780,3585 ; 11035,3685 11285,3685 11530,3685 11780,3685 ; 11042.4,7750 11042.4,7270 11514.25,7270 11514.25,6690 ; 11085,3980 11085,4225 11085,4475 ; 11099,1085 11099,1330 11099,1580 ; 11154.25,7765 11484.25,7765 11484.25,7565 11749.25,7565 11749.25,6490 11639.25,6490 ; 11185,3980 11185,4225 11185,4475 ; 11199,1085 11199,1330 11199,1580 ; 11285,3485 11530,3485 11780,3485 ; 11285,3980 11285,4225 11285,4475 ; 11299,1085 11299,1330 11299,1580 ; 11385,3980 11385,4225 11385,4475 ; 11399,1085 11399,1330 11399,1580 ; 11485,3980 11485,4225 11485,4475 ; 11499,1085 11499,1330 11499,1580 ; 11585,3980 11585,4225 11585,4475 ; 11599,1085 11599,1330 11599,1580 ; 11674.25,6755 11674.25,6690 11514.25,6690 ; 11685,3980 11685,4225 11685,4475 ; 11699,1085 11699,1330 11699,1580 ; v1(11704.25,5015) 11662.99,5015 11662.99,5368.31 11744.25,5368.31 ; 11744.25,5168.31 11744.25,5055 12144.25,5055 v1(12144.25,4920) ; 11849.25,5168.31 11852.56,5165 11857.56,5170 v1@11962.56,5170 ; 11864.25,6605 12204.25,6605 12204.25,7775 ; 11960,1590 12005,1635 12005,1810 11980,1835 11950,1835 11915.47,1869.53 11915.47,1915.47 11938,1938 11977,1938 12220,2181 12220,2365 ; 11960,1690 11915,1735 11915,1773.61 11895.47,1793.14 11895.47,1935 11915,1954.53 11915,2360 11970,2415 12150,2415 12165,2430 12165,2570 12220,2625 ; 11960,1890 12265,2195 12265,3110 12215,3160 ; v1(11999.25,4805) v1(12144.25,4805) ; 12115,3525 12070,3480 12070,3305 12115,3260 12070,3215 12070,3040 12115,2995 12160,2950 12160,2765 12120,2725 12075,2680 12075,2510 12120,2465 ; 5143,7668 5125,7650 5143,7650 5143,7668 ; 7322.19,3855 7326.19,3855 7401.19,3780 ; 7322.19,3855 7401.19,3780
  Bottom Layer w30: 1180,4250 1550,4250 1550,3805 1916.57,3805 ; 1185,4065 1415,4065 1415,3705 2113.43,3705 2113.43,3805 ; 1285,4225 v1@1285,4265
  other v1: 1280,4250 11967.56,5170
  other v2: 11210.94,6491.69 11254.25,6491.69 11297.56,6491.69 11210.94,6535 11297.56,6535 11210.94,6578.31 11254.25,6578.31 11297.56,6578.31

## Other copper
Top Layer:
  rectangle: 1320,1100 1435,1215
  rectangle: 1050,1670 1165,1790
  rectangle: 2605,2870 2745,2950
  region: 1280,5195 1280,5275 1200,5275 1200,5195
  region: 1200,4225 1200,4355 1120,4355 1120,4225
  text "530 (mil)" at 4579.08,5026.04 h60
  text "100 (mil)" at 5214.07,5026.04 h60
  text "530 (mil)" at 5839.08,5026.04 h60
  text "100 (mil)" at 6474.07,5026.04 h60
  text "530 (mil)" at 7099.08,5026.04 h60
Bottom Layer:
  region: 1190,4005 1190,4110 1115,4110 1115,4005

## Text inside footprints (layer, text, board x,y; h text height)
P1_3: Top Overlay "6" at 10544.25,6880 h50 r90; Top Overlay "5" at 10439.25,6880 h50 r90; Top Overlay "2" at 10544.25,6525 h50 r90; Top Overlay "1" at 10444.25,6535 h50 r90
P2_2: Top Overlay "6" at 11824.25,5105 h50 r270; Top Overlay "5" at 11724.25,5105 h50 r270; Top Overlay "2" at 11824.25,5465 h50 r270; Top Overlay "1" at 11724.25,5445 h50 r270
P13_1: Top Overlay "6" at 12270,3775 h50; Top Overlay "5" at 12270,3675 h50; Top Overlay "2" at 11910,3775 h50; Top Overlay "1" at 11930,3675 h50
P14: Top Overlay "6" at 12275,3505 h50; Top Overlay "5" at 12275,3405 h50; Top Overlay "2" at 11915,3505 h50; Top Overlay "1" at 11935,3405 h50
P15: Top Overlay "6" at 12275,3240 h50; Top Overlay "5" at 12275,3140 h50; Top Overlay "2" at 11915,3240 h50; Top Overlay "1" at 11935,3140 h50
P17: Top Overlay "6" at 12275,2975 h50; Top Overlay "5" at 12275,2875 h50; Top Overlay "2" at 11915,2975 h50; Top Overlay "1" at 11935,2875 h50
P18: Top Overlay "6" at 12280,2705 h50; Top Overlay "5" at 12280,2605 h50; Top Overlay "2" at 11920,2705 h50; Top Overlay "1" at 11940,2605 h50
P19: Top Overlay "6" at 12280,2445 h50; Top Overlay "5" at 12280,2345 h50; Top Overlay "2" at 11920,2445 h50; Top Overlay "1" at 11940,2345 h50